# Altium PCB MAX96724_EVB_revB.PcbDoc (part 2 of 2)
Units mm, origin at the board's own origin, x right, y up, seen from the top; angles counter-clockwise.
Board outline 80 x 80 mm, 4 copper layers (Top Layer, Mid Layer 1, Mid Layer 2, Bottom Layer), stack 1.586 mm thick; 167 components, 106 nets, 496 pads, 209 vias.
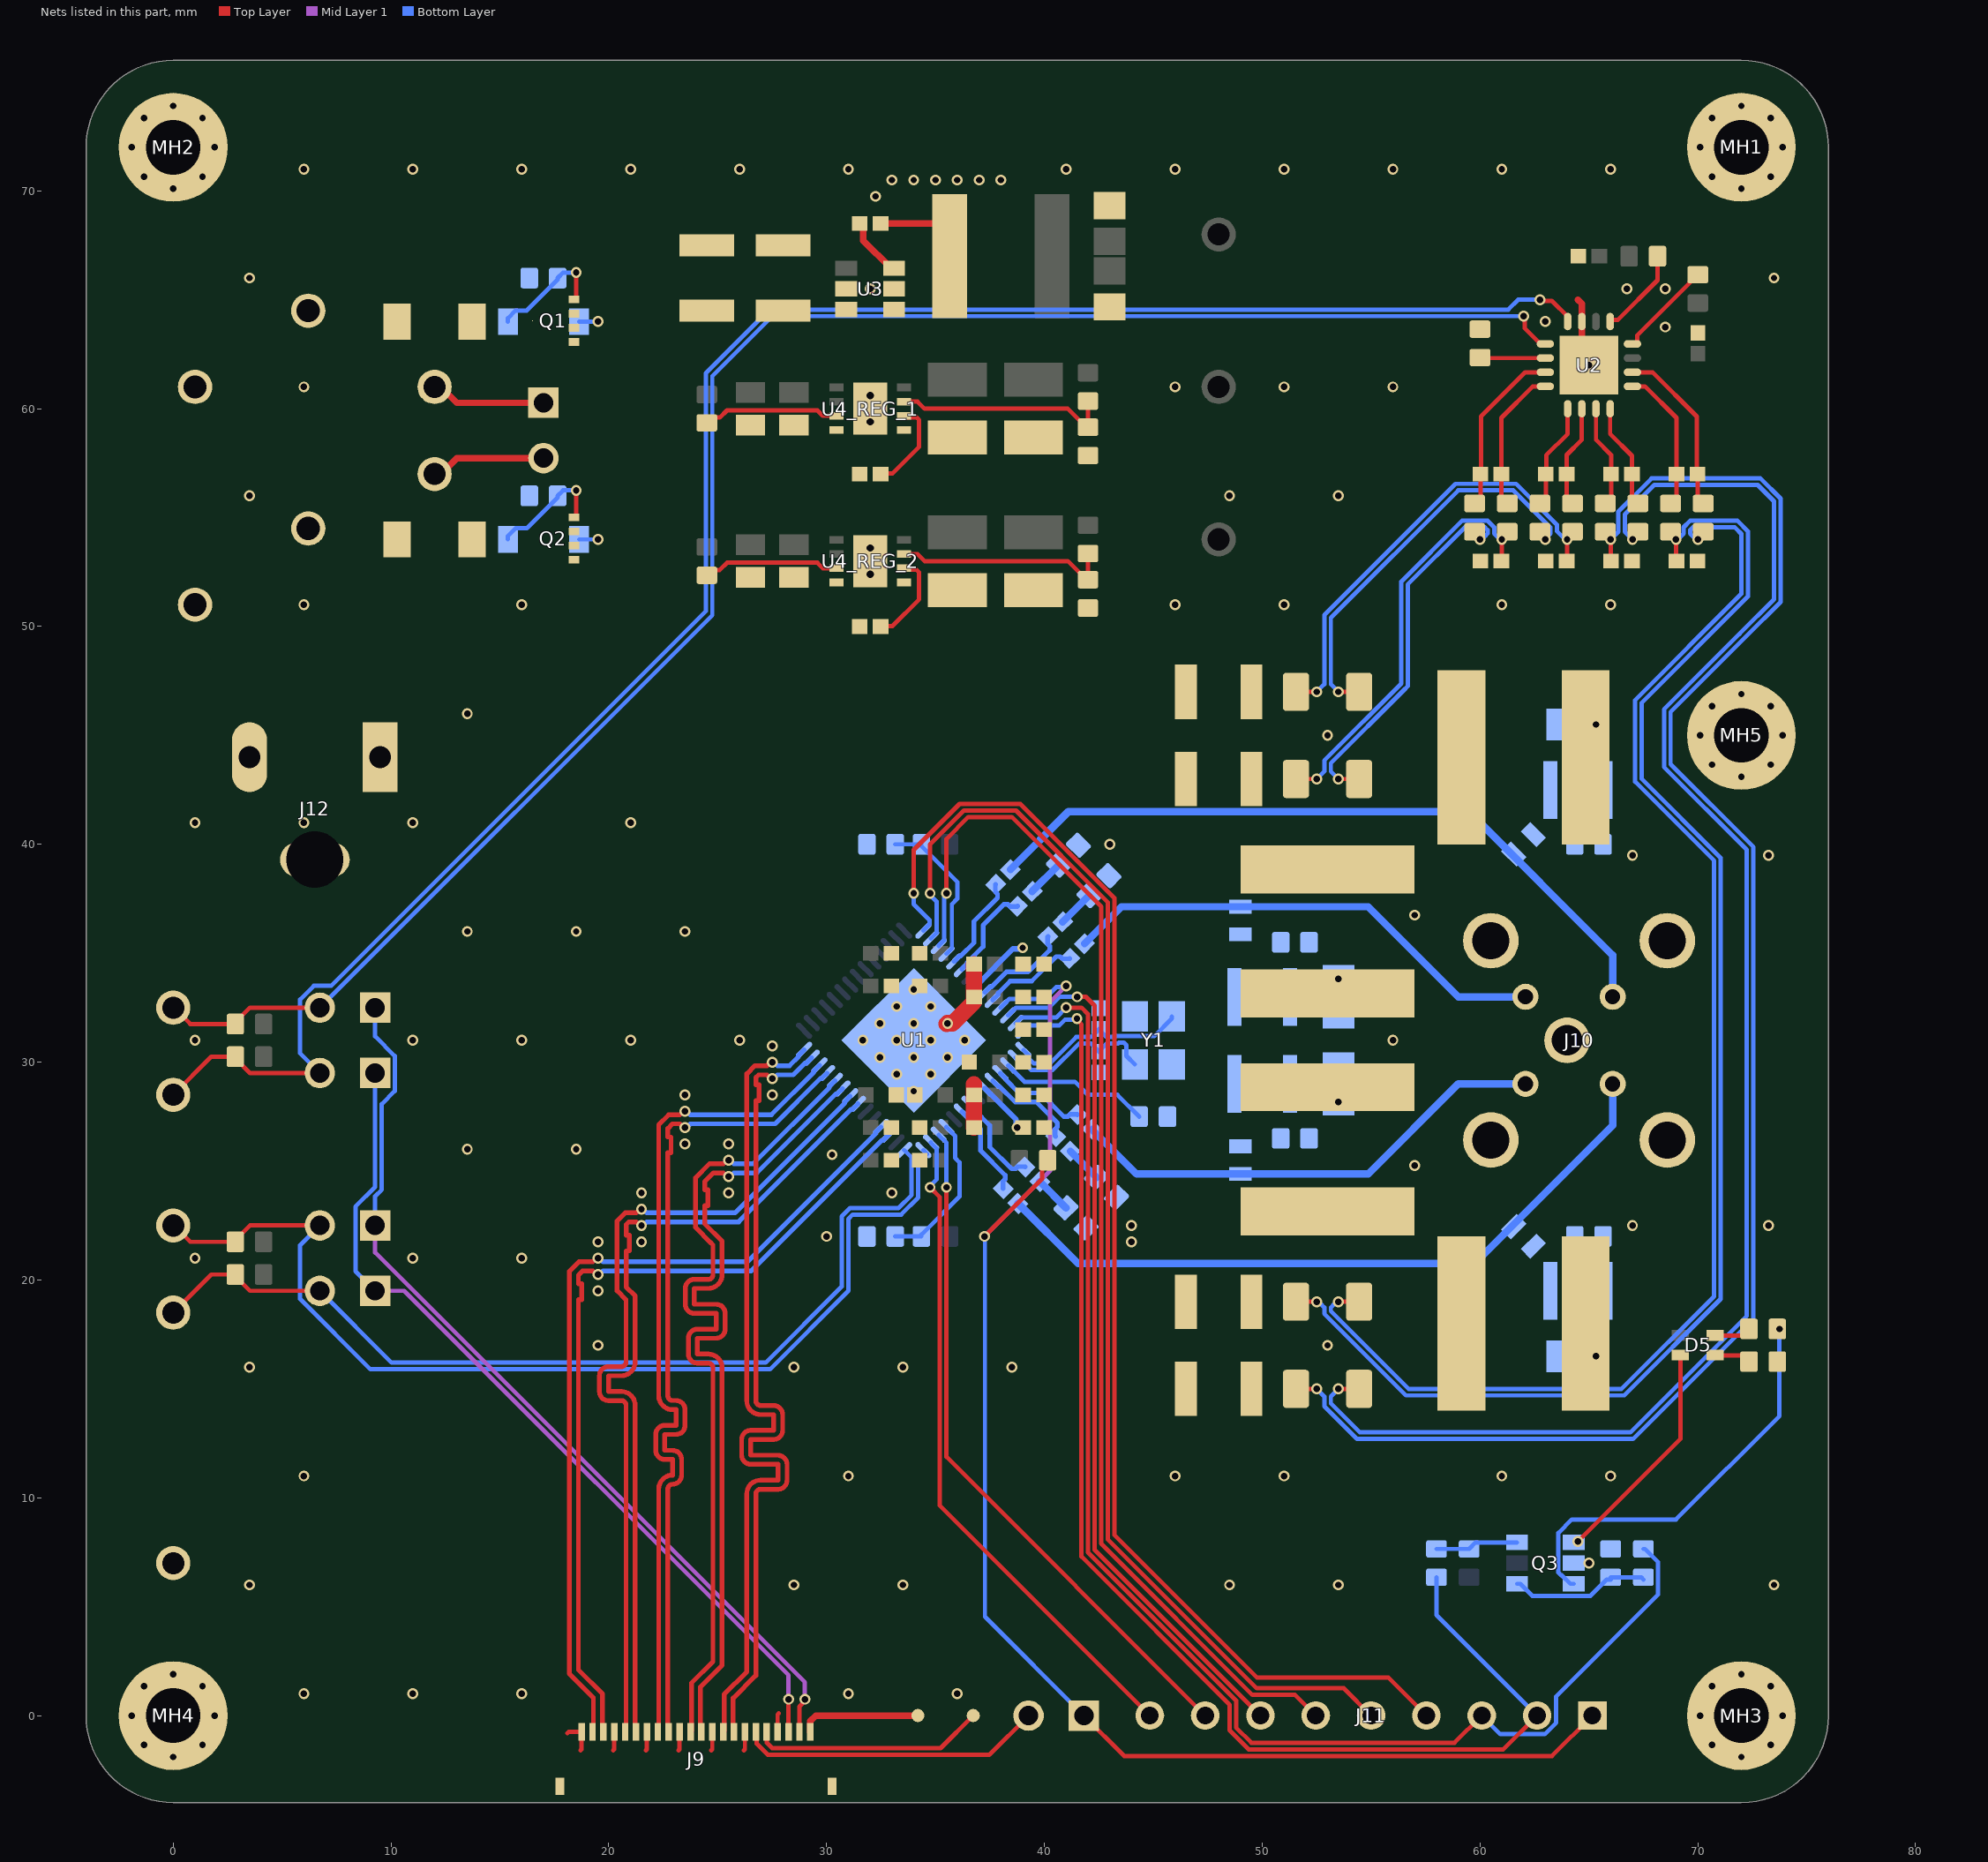
[diagram p4: the nets of this part, all layers, seen from the top]

## Via types
v1: diameter 0.5, hole 0.3, Top Layer to Bottom Layer, tented both sides, 205 vias
v2: diameter 0.66, hole 0.33, Top Layer to Bottom Layer, tented both sides, 4 vias

## Nets (pads, with @x,y where several pads share a name; then routed paths per layer and width w, separated by ;. In a path a pad name is that pad's centre, name@x,y a point inside that pad or via, vN(x,y) a via of type N, cw(c..) or ccw(c..) an arc to the next point about the centre after c; other vN are vias at no path point) (continued)
3V3_CAM_I2C_SCL: J14.1 P5.2 R5.1 U1.29 | length 43.6
  Top Layer w0.2: J14.1@0,18.5 1.75,20.25 R5.1@2.85,20.25 ; R5.1@2.85,20.175 3.525,19.5 P5.2@6.73,19.5
  Bottom Layer w0.2: P5.2@6.73,19.5 10.03,16.2 24.473,16.2 24.475,16.202 27.202,16.202 30.698,19.698 30.698,22.925 31.073,23.3 33.3,23.3 33.9,23.9 33.9,25.62 U1.29@33.558,25.962
3V3_CAM_I2C_SDA: J13.1 P4.2 R4.1 U1.28 | length 48.4
  Top Layer w0.2: J13.1@0,22.5 0.034,22.5 0.784,21.75 R4.1@2.85,21.75 ; R4.1@2.85,21.825 3.525,22.5 P4.2@6.73,22.5
  Bottom Layer w0.2: P4.2@6.73,22.5 5.828,21.598 5.828,19.127 9.057,15.898 24.598,15.898 24.6,15.9 27.4,15.9 31,19.5 31,22.8 31.198,22.998 33.425,22.998 34.202,23.775 34.202,25.368 34.602,25.769 34.602,25.801 U1.28@34.442,25.962
3V3_FPC_IO0: J9.6 P2.2 | length 14
  Top Layer w0.2: J9.6@26.75,-0.75 26.787,-0.787 26.787,-1.287 27.3,-1.8 37.47,-1.8 P2.2@39.27,0
3V3_FPC_IO1: J9.5 TP2.1 | length 10.7
  Top Layer w0.2: J9.5@27.25,-0.75 27.25,-1.25 27.498,-1.498 35.232,-1.498 TP2.1@36.73,0
3V3_FPC_SCL: J9.3 P5.1 P8.1 | length 39.6
  Top Layer w0.2: J9.3@28.25,-0.75 v1(28.25,0.75)
  Mid Layer 1 w0.2: P5.1@9.27,19.5 10.6,19.5 28.25,1.85 v1(28.25,0.75)
  Bottom Layer w0.2: P5.1@9.27,19.5 8.368,20.402 8.368,23.368 9.27,24.27 P8.1@9.27,29.5
3V3_FPC_SDA: J9.2 P4.1 P7.1 | length 42.3
  Top Layer w0.2: J9.2@28.75,-0.75 28.75,0.419 29,0.669 v1(29,0.75)
  Mid Layer 1 w0.2: P4.1@9.27,22.5 9.27,21.257 29,1.527 v1(29,0.75)
  Bottom Layer w0.2: P4.1@9.27,22.5 9.27,23.843 9.572,24.145 9.572,28.072 10.172,28.672 10.172,30.284 9.27,31.185 P7.1@9.27,32.5
3V3_LOCK: J11.3 R12.2 U1.13 | length 65.6
  Top Layer w0.2: v1(41,32.5) 41.707,32.5 42.002,32.206 42.002,7.492 48.802,0.692 48.802,-0.552 49.5,-1.25 58.83,-1.25 J11.3@60.08,0
  Bottom Layer w0.2: U1.13@38.685,31.795 38.932,32.043 40.543,32.043 v1(41,32.5) ; J11.3@60.08,0 60.937,-0.857 62.975,-0.857 63.5,-0.331 63.5,0.883 68.177,5.56 68.177,7.048 67.575,7.65 R12.2@67.5,7.65
3V3_MFP0: J11.4 U1.1 | length 63
  Top Layer w0.2: v1(34,37.75) 34,39.75 36.103,41.853 38.897,41.853 43.208,37.542 43.208,8.292 49.75,1.75 55.79,1.75 J11.4@57.54,0
  Bottom Layer w0.2: v1(34,37.75) 34,37.25 34.726,36.524 34.726,36.336 34.442,36.052 U1.1@34.442,36.038
3V3_MFP1: J11.5 U1.2 | length 59.8
  Top Layer w0.2: v1(34.75,37.75) 34.75,40 36.302,41.552 38.698,41.552 42.906,37.344 42.906,8.094 49.75,1.25 53.75,1.25 J11.5@55,0
  Bottom Layer w0.2: v1(34.75,37.75) 34.75,37.669 35.043,37.376 35.043,35.932 U1.2@34.795,35.685
3V3_MFP2: J11.6 U1.3 | length 56.7
  Top Layer w0.2: v1(35.5,37.75) 35.5,40.25 36.5,41.25 38.5,41.25 42.605,37.145 42.605,7.895 49.552,0.948 51.512,0.948 J11.6@52.46,0
  Bottom Layer w0.2: U1.3@35.149,35.331 35.149,35.354 35.397,35.602 35.397,37.565 35.5,37.669 v1(35.5,37.75)
3V3_MFP3: J11.7 U1.12 | length 40.2
  Top Layer w0.2: v1(41.5,33) 41.9,33 42.303,32.597 42.303,7.617 J11.7@49.92,0
  Bottom Layer w0.2: U1.12@38.331,32.149 38.345,32.149 38.696,32.5 40.2,32.5 40.7,33 v1(41.5,33)
3V3_MFP7: J11.8 U1.26 | length 31.7
  Top Layer w0.2: v1(35.5,24.25) 35.502,24.248 35.502,11.878 J11.8@47.38,0
  Bottom Layer w0.2: U1.26@35.149,26.669 35.149,26.655 35.5,26.304 v1(35.5,24.25)
3V3_MFP8: J11.9 U1.27 | length 30.7
  Top Layer w0.2: v1(34.75,24.25) 35.2,23.8 35.2,9.64 J11.9@44.84,0
  Bottom Layer w0.2: v1(34.75,24.25) 34.75,24.318 35.043,24.611 35.043,26.045 34.795,26.292 U1.27@34.795,26.315
3V3_nERRB: J11.2 R10.1 U1.14 | length 61.7
  Top Layer w0.2: v1(41.494,32) 41.494,31.939 41.7,31.733 41.7,7.3 48.5,0.5 48.5,-0.677 49.375,-1.552 61.068,-1.552 J11.2@62.62,0
  Bottom Layer w0.2: U1.14@39.038,31.442 39.286,31.689 40.689,31.689 40.944,31.944 41.437,31.944 v1(41.494,32) ; R10.1@58,6.35 58,4.62 J11.2@62.62,0
3V3_nPWDN: J11.1 P2.1 R3.1 U1.11 | length 70
  Top Layer w0.2: v1(37.25,22) 39.894,24.644 39.894,25.244 R3.1@40.15,25.5 ; P2.1@41.81,0 43.663,-1.853 63.307,-1.853 J11.1@65.16,0
  Mid Layer 1 w0.2: v1(37.25,22) 40.25,25 40.25,32.75 v1(41,33.5)
  Bottom Layer w0.2: v1@37.27,22 37.27,4.54 P2.1@41.81,0 ; U1.11@37.977,32.503 37.991,32.503 38.388,32.9 40,32.9 40.543,33.443 40.943,33.443 v1(41,33.5)
3V3_SNS_I2C_SCL: J16.1 P8.2 R7.1 U2.4 | length 89.9
  Top Layer w0.2: J16.1@0,28.5 1.75,30.25 R7.1@2.85,30.25 ; R7.1@2.85,30.175 3.525,29.5 P8.2@6.73,29.5 ; v1(62.75,65) 62.8,64.95 63.3,64.95 64.025,64.225 U2.4@64.025,64
  Bottom Layer w0.2: P8.2@6.73,29.5 5.828,30.402 5.828,32.873 6.455,33.5 7.25,33.5 24.448,50.698 24.448,61.625 27.375,64.552 61.302,64.552 61.75,65 v1(62.75,65)
3V3_SNS_I2C_SDA: J15.1 P7.2 R6.1 U2.5 | length 84
  Top Layer w0.2: J15.1@0,32.5 0.034,32.5 0.784,31.75 R6.1@2.85,31.75 ; R6.1@2.85,31.825 3.525,32.5 P7.2@6.73,32.5 ; v1(62,64.25) 62.05,64.2 62.05,63.7 62.775,62.975 U2.5@63,62.975
  Bottom Layer w0.2: P7.2@6.73,32.5 24.75,50.52 24.75,61.5 27.5,64.25 v1(62,64.25)
3V3_SNS_nALERT: R39.1 U2.1 | length 4.1
  Top Layer w0.2: U2.1@65.975,64 65.975,64.014 66.044,64.083 66.333,64.083 68.15,65.9 R39.1@68.15,67
CFG0: R15.1 R17.2 U1.4 | length 7
  Bottom Layer w0.2: R17.2@33.15,40 R15.1@34.35,40 ; R15.1@34.35,39.925 36,38.275 36,37.5 35.75,37.25 35.75,35.225 U1.4@35.503,34.977
CFG1: R20.1 R23.2 U1.25 | length 7.2
  Bottom Layer w0.2: R23.2@33.15,22 R20.1@34.35,22 34.35,22.075 36.1,23.825 36.1,25.4 35.9,25.6 35.9,26.612 35.503,27.009 U1.25@35.503,27.023
CSIA_CK_N: J9.15 U1.40 | length 38.8
  Top Layer w0.217: J9.15@22.25,-0.75 22.291,-0.709 22.291,9.236 22.291,10.402 cw(c22.926,10.402) 22.926,11.037 22.926,11.762 22.57,11.762 cw(c22.57,12.18) 22.152,12.18 22.152,12.905 cw(c22.57,12.905) 22.57,13.322 23.084,13.322 23.084,14.048 22.926,14.048 cw(c22.926,14.683) 22.291,14.683 22.291,15 22.291,27.124 22.751,27.584 23.257,27.584 23.424,27.75 v1(23.5,27.75)
  Bottom Layer w0.217: v1(23.5,27.75) 23.576,27.75 23.743,27.584 27.46,27.584 29.415,29.539 29.415,29.597 U1.40@29.669,29.851
CSIA_CK_P: J9.14 U1.39 | length 38.7
  Top Layer w0.217: J9.14@22.75,-0.75 22.709,-0.709 22.709,-0.198 22.709,9.236 22.709,10.402 cw(c22.926,10.402) 22.926,10.619 ccw(c22.926,11.037) 23.344,11.037 23.344,11.762 ccw(c22.926,11.762) 22.926,12.18 22.57,12.18 22.57,12.905 23.084,12.905 ccw(c23.084,13.322) 23.501,13.322 23.501,14.048 ccw(c23.084,14.048) 23.084,14.465 22.926,14.465 cw(c22.926,14.683) 22.709,14.683 22.709,15 22.709,25 22.709,25.834 22.857,25.834 22.857,26.56 22.709,26.56 22.709,26.75 22.709,26.951 22.924,27.166 23.257,27.166 23.424,27 v1(23.5,27)
  Bottom Layer w0.217: v1(23.5,27) 23.576,27 23.743,27.166 27.633,27.166 29.71,29.244 29.769,29.244 U1.39@30.023,29.497
CSIA_D0_N: J9.21 U1.32 | length 38.8
  Top Layer w0.217: J9.21@19.25,-0.75 19.291,-0.709 19.291,-0.198 19.291,0.818 18.183,1.927 18.183,2.5 18.183,11.5 18.183,20.389 18.627,20.834 19.257,20.834 19.424,21 v1(19.5,21)
  Bottom Layer w0.217: v1(19.5,21) 19.576,21 19.743,20.834 26.367,20.834 32.244,26.71 32.244,26.769 U1.32@32.497,27.023
CSIA_D0_P: J9.20 U1.31 | length 38.8
  Top Layer w0.217: v1(19.5,20.25) 19.424,20.25 19.257,20.416 18.8,20.416 18.6,20.216 18.6,20 18.6,19.824 18.748,19.824 18.748,19.099 18.6,19.099 18.6,18.265 18.6,2.1 19.709,0.991 19.709,-0.198 19.709,-0.709 J9.20@19.75,-0.75
  Bottom Layer w0.217: v1(19.5,20.25) 19.576,20.25 19.743,20.416 26.54,20.416 32.539,26.415 32.597,26.415 U1.31@32.851,26.669
CSIA_D1_N: J9.18 U1.36 | length 38.8
  Top Layer w0.217: J9.18@20.75,-0.75 20.791,-0.709 20.791,-0.198 20.791,11.75 20.791,14.243 ccw(c20.574,14.243) 20.574,14.46 19.985,14.46 cw(c19.985,14.878) 19.567,14.878 19.567,15.603 cw(c19.985,15.603) 19.985,16.02 20.574,16.02 ccw(c20.574,16.238) 20.791,16.238 20.791,17.698 20.791,19.093 20.379,19.505 20.379,22.712 20.751,23.084 21.257,23.084 21.424,23.25 v1(21.5,23.25)
  Bottom Layer w0.217: v1(21.5,23.25) 21.576,23.25 21.743,23.084 25.789,23.084 30.829,28.125 30.829,28.183 U1.36@31.083,28.437
CSIA_D1_P: J9.17 U1.35 | length 38.7
  Top Layer w0.217: J9.17@21.25,-0.75 21.209,-0.709 21.209,-0.198 21.209,11.75 21.209,14.243 ccw(c20.574,14.243) 20.574,14.878 19.985,14.878 19.985,15.603 20.574,15.603 ccw(c20.574,16.238) 21.209,16.238 21.209,17.698 21.209,19.266 20.797,19.678 20.797,20.5 20.797,21.334 20.944,21.334 20.944,22.06 20.797,22.06 20.797,22.25 20.797,22.539 20.924,22.666 21.257,22.666 21.424,22.5 v1(21.5,22.5)
  Bottom Layer w0.217: v1(21.5,22.5) 21.576,22.5 21.743,22.666 25.961,22.666 31.125,27.829 31.183,27.829 U1.35@31.437,28.083
CSIA_D2_N: J9.12 U1.38 | length 38.8
  Top Layer w0.217: J9.12@23.75,-0.75 23.791,-0.709 23.791,-0.198 23.791,1.491 24.783,2.483 24.783,15.03 24.783,15.964 ccw(c24.565,15.964) 24.565,16.181 24.069,16.181 cw(c24.069,16.599) 23.652,16.599 23.652,17.324 cw(c24.069,17.324) 24.069,17.742 24.926,17.742 24.926,18.467 23.927,18.467 cw(c23.927,18.884) 23.51,18.884 23.51,19.61 cw(c23.927,19.61) 23.927,20.027 24.565,20.027 ccw(c24.565,20.245) 24.783,20.245 24.783,21.606 24.684,21.705 23.983,22.406 23.983,24.689 24.627,25.334 25.257,25.334 25.424,25.5 v1(25.5,25.5)
  Bottom Layer w0.217: v1(25.5,25.5) 25.576,25.5 25.743,25.334 26.624,25.334 30.122,28.832 30.122,28.89 U1.38@30.376,29.144
CSIA_D2_P: J9.11 U1.37 | length 38.7
  Top Layer w0.217: J9.11@24.25,-0.75 24.209,-0.709 24.209,1.318 25.2,2.31 25.2,15.03 25.2,15.964 ccw(c24.565,15.964) 24.565,16.599 24.069,16.599 24.069,17.324 24.926,17.324 ccw(c24.926,17.742) 25.344,17.742 25.344,18.467 ccw(c24.926,18.467) 24.926,18.884 23.927,18.884 23.927,19.61 24.565,19.61 ccw(c24.565,20.245) 25.2,20.245 25.2,21.705 25.2,21.779 24.4,22.579 24.4,23.413 24.548,23.413 24.548,24.139 24.4,24.139 24.4,24.516 24.584,24.7 24.8,24.916 25.257,24.916 25.424,24.75 v1(25.5,24.75)
  Bottom Layer w0.217: v1(25.5,24.75) 25.576,24.75 25.743,24.916 26.797,24.916 30.418,28.537 30.476,28.537 U1.37@30.73,28.79
CSIA_D3_N: J9.9 U1.42 | length 38.8
  Top Layer w0.217: J9.9@25.25,-0.75 25.291,-0.709 25.291,-0.198 25.291,0.97 26.333,2.011 26.333,8.714 26.333,10.175 cw(c26.967,10.175) 26.967,10.809 27.764,10.809 27.764,11.535 26.518,11.535 cw(c26.518,11.952) 26.1,11.952 26.1,12.678 cw(c26.518,12.678) 26.518,13.095 27.562,13.095 27.562,13.82 26.967,13.82 cw(c26.967,14.455) 26.333,14.455 26.333,15.526 26.333,29.462 26.704,29.834 27.257,29.834 27.424,30 v1(27.5,30)
  Bottom Layer w0.217: v1(27.5,30) 27.576,30 27.743,29.834 28.296,29.834 28.708,30.246 28.708,30.304 U1.42@28.962,30.558
CSIA_D3_P: J9.8 U1.41 | length 38.7
  Top Layer w0.217: J9.8@25.75,-0.75 25.709,-0.709 25.709,0.797 26.75,1.838 26.75,8.714 26.75,10.175 cw(c26.967,10.175) 26.967,10.392 27.764,10.392 ccw(c27.764,10.809) 28.182,10.809 28.182,11.535 ccw(c27.764,11.535) 27.764,11.952 26.518,11.952 26.518,12.678 27.562,12.678 ccw(c27.562,13.095) 27.98,13.095 27.98,13.82 ccw(c27.562,13.82) 27.562,14.238 26.967,14.238 cw(c26.967,14.455) 26.75,14.455 26.75,15.526 26.75,27.399 26.75,28.233 26.898,28.233 26.898,28.959 26.75,28.959 26.75,29.205 26.75,29.289 26.877,29.416 27.257,29.416 27.424,29.25 v1(27.5,29.25)
  Bottom Layer w0.217: v1(27.5,29.25) 27.576,29.25 27.743,29.416 28.469,29.416 29.003,29.951 29.062,29.951 U1.41@29.315,30.205
FPC_3V3: J9.1 TP1.1 | length 5.5
  Top Layer w0.3: J9.1@29.25,-0.75 29.25,-0.25 29.5,0 TP1.1@34.19,0
GND: C6.2 C8.1 C10.2 C12.1 C14.1 C15.1 C16.2 C18.1 C20.2 C22.1 C26.1 C27.1 C28.1 C29.1 C30.1 C31.1 C32.1 C33.1 C34.1 C35.1 C37.1 C38.1 C39.1 C40.1 C41.1 C42.1 C43.1 C44.1 C45.1 C46.1 C47.2 C48.2 C49.2 C51.2 C52.2 C53.2 C54.2 C55_REG_1.2 C55_REG_2.2 C56_REG_1.2 C56_REG_2.2 C57_REG_1.2 C57_REG_2.2 C58_REG_1.2 C58_REG_2.2 C59_REG_1.2 C59_REG_2.2 J1.2 J6.2 J8.1 J9.4 J9.7 J9.10 J9.13 J9.16 J9.19 J9.22 J9.S1 J9.S2 J10.MH1 J10.MH2 J10.MH3 J10.MH4 J10.MH5 J12.2 J12.3 MH1.1 MH1.2 MH1.3 MH1.4 MH1.5 MH1.6 MH1.7 MH2.1 MH2.2 MH2.3 MH2.4 MH2.5 MH2.6 MH2.7 MH3.1 MH3.2 MH3.3 MH3.4 MH3.5 MH3.6 MH3.7 MH4.1 MH4.2 MH4.3 MH4.4 MH4.5 MH4.6 MH4.7 MH5.1 MH5.2 MH5.3 MH5.4 MH5.5 MH5.6 MH5.7 Q3.5 R1.1 R2.1 R9.1 R13.2 R17.1 R18.1 R22.1 R23.1 R24.1 R27.1 R30.1 R41.2 R44_REG_1.1 R44_REG_2.1 U1.57 U2.3 U2.17 U3.4 U4_REG_1.4 U4_REG_1.9 U4_REG_2.4 U4_REG_2.9 Y1.2 Y1.4 | length 15.3
  Top Layer w0.2: 18.1,-0.8 18.15,-0.75 J9.22@18.75,-0.75 18.75,-1.55 18.7,-1.6 ; 20.2,-1.6 20.25,-1.55 J9.19@20.25,-0.75 ; 21.7,-1.6 21.75,-1.55 J9.16@21.75,-0.75 ; 23.2,-1.6 23.25,-1.55 J9.13@23.25,-0.75 ; 24.7,-1.6 24.75,-1.55 J9.10@24.75,-0.75 ; 26.2,-1.6 26.25,-1.55 J9.7@26.25,-0.75 ; J9.4@27.75,-0.75 27.75,0.05 27.8,0.1
  Top Layer w0.3: 64.5,65 64.675,64.825 U2.3@64.675,64 64.675,62.325 v1(65,62)
  Top Layer w0.75: v1@35.5,31.75 v1@35.542,31.792 ; v1(35.556,31.778) 35.778,31.778 36.771,32.771 C39.1@36.771,33 ; C42.1@36.771,27 36.771,28.979 ; C39.1@36.771,33.021 C40.1@36.771,34.5
  other v1: 6,1 11,1 16,1 31,1 36,1 3.5,6 28.5,6 33.5,6 48.5,6 53.5,6 73.5,6 65,7 6,11 31,11 46,11 51,11 61,11 66,11 3.5,16 28.5,16 33.5,16 38.5,16 19.5,17 53,17 19.5,19.5 1,21 11,21 16,21 19.5,21.75 21.5,21.75 44,21.75 30,22 44,22.5 67,22.5 73.25,22.5 21.5,24 25.5,24 33,24 57,25.25 30.25,25.75 13.5,26 18.5,26 23.5,26.25 25.5,26.25 23.5,28.5 27.5,28.5 34,28.667 33.222,29.444 34.778,29.444 32.444,30.222 34,30.222 35.556,30.222 27.5,30.75 1,31 11,31 16,31 21,31 26,31 31.667,31 33.222,31 34.778,31 36.333,31 56,31 32.444,31.778 34,31.778 33.222,32.556 34.778,32.556 34,33.333 13.5,36 18.5,36 23.5,36 57,36.75 67,39.5 73.25,39.5 43,40 1,41 6,41 11,41 21,41 53,45 13.5,46 6,51 16,51 46,51 51,51 61,51 66,51 3.5,56 48.5,56 53.5,56 6,61 46,61 51,61 56,61 68.5,63.75 63,64 32,65.5 66.75,65.5 68.5,65.5 3.5,66 73.5,66 32.25,69.75 33,70.5 34,70.5 35,70.5 36,70.5 37,70.5 38,70.5 6,71 11,71 16,71 21,71 26,71 31,71 41,71 46,71 51,71 56,71 61,71 66,71
  other v2: 32,52.4 32,53.6 32,59.4 32,60.6
LO_VCC: C51.1 C52.1 D1.1 J3.1 P1.1 Q1.1 Q1.2 Q1.3 U3.2 U3.3 | length 6.2
  Top Layer w0.3: J3.1@12,61 12.287,61 13.017,60.27 P1.1@17,60.27
  Bottom Layer w0.2: D1.1@18.635,64 v1(19.5,64)
MAX96724_PoC_A_V_N: L1.1 R14.1 R32.1 | length 73.7
  Top Layer w0.2: v1(53.5,15) R14.1@54.45,15
  Bottom Layer w0.2: v1(53.5,15) 53.151,14.651 53.151,14.331 54.482,13 66.9,13 72.25,18.35 72.25,39.75 68.448,43.552 68.448,46.198 68.625,46.375 71.912,49.662 73.5,51.25 73.5,55.75 72.75,56.5 68,56.5 66.651,55.151 66.651,54.349 v1(67,54)
MAX96724_PoC_A_V_P: C8.2 F3.2 R14.2 R31.1 | length 76.7
  Top Layer w0.2: R14.2@51.55,15 v1(52.5,15) ; v1(66,54) 66,53.021 C8.2@66.021,53
  Bottom Layer w0.2: v1(52.5,15) 52.849,14.651 52.849,14.206 54.357,12.698 67.025,12.698 72.552,18.225 72.552,39.875 68.75,43.677 68.75,46.073 72.213,49.537 73.802,51.125 73.802,55.875 72.875,56.802 67.875,56.802 66.349,55.276 66.349,54.349 v1(66,54)
MAX96724_PoC_B_V_N: L4.1 R19.1 R34.1 | length 64.1
  Top Layer w0.2: v1(53.5,19) R19.1@54.45,19
  Bottom Layer w0.2: v1(53.5,19) 53.419,19 53.273,18.854 53.268,18.854 53.151,18.737 53.151,18.571 56.722,15 66.5,15 70.75,19.25 70.75,39.25 67.125,42.875 67.125,46.625 72,51.5 72,54.25 71.75,54.5 71.7,54.55 69.772,54.55 69.651,54.429 69.651,54.263 69.768,54.146 69.773,54.146 69.919,54 v1(70,54)
MAX96724_PoC_B_V_P: C12.2 F4.2 R19.2 R33.1 | length 67.1
  Top Layer w0.2: R19.2@51.55,19 v1(52.5,19) ; v1(69,54) 69,53.021 C12.2@69.021,53
  Bottom Layer w0.2: v1(52.5,19) 52.581,19 52.727,18.854 52.732,18.854 52.849,18.737 52.849,18.446 56.597,14.698 66.625,14.698 71.052,19.125 71.052,39.375 67.427,43 67.427,46.5 72.302,51.375 72.302,54.375 71.825,54.852 69.647,54.852 69.349,54.554 69.349,54.263 69.232,54.146 69.227,54.146 69.081,54 v1(69,54)
MAX96724_PoC_C_V_N: L7.1 R25.1 R36.1 | length 16.9
  Top Layer w0.2: v1(53.5,43) R25.1@54.45,43
  Bottom Layer w0.2: v1(53.5,43) 53.151,43.349 53.151,43.724 56.505,47.079 56.682,47.256 56.682,51.932 59.3,54.55 60.228,54.55 60.349,54.429 60.349,54.263 60.232,54.146 60.227,54.146 60.081,54 v1(60,54)
MAX96724_PoC_C_V_P: C18.2 F5.2 R25.2 R35.1 | length 18.9
  Top Layer w0.2: R25.2@51.55,43 v1(52.5,43) ; C18.2@60.979,53 61,53.021 v1(61,54)
  Bottom Layer w0.2: v1(52.5,43) 52.849,43.349 52.849,43.849 56.381,47.381 56.381,52.057 59.175,54.852 60.353,54.852 60.651,54.554 60.651,54.263 60.768,54.146 60.773,54.146 60.919,54 v1(61,54)
MAX96724_PoC_D_V_N: L10.1 R28.1 R40.1 | length 18.3
  Top Layer w0.2: v1(53.5,47) R28.1@54.45,47
  Bottom Layer w0.2: v1(53.5,47) 53.151,47.349 53.151,50.401 59,56.25 61.528,56.25 63.227,54.551 63.227,54.267 63,54.04 v1(63,54)
MAX96724_PoC_D_V_P: C22.2 F6.2 R28.2 R38.1 | length 20.5
  Top Layer w0.2: R28.2@51.55,47 v1(52.5,47) ; C22.2@63.979,53 64,53.021 v1(64,54)
  Bottom Layer w0.2: v1(52.5,47) 52.849,47.349 52.849,50.526 58.875,56.552 61.653,56.552 63.529,54.676 63.529,54.38 63.646,54.263 63.651,54.263 63.768,54.146 63.773,54.146 63.919,54 v1(64,54)
NetC6_1: C6.1 L1.2 L2.1 R16.2
  other v1: 65.326,16.5
NetC7_2: C7.2 R18.2 | length 1.7
  Bottom Layer w0.342: C7.2@39.788,24.512 R18.2@40.99,23.31
NetC10_1: C10.1 L4.2 L5.1 R21.2
  other v1: 53.5,28.174
NetC11_2: C11.2 R24.2 | length 1.7
  Bottom Layer w0.342: C11.2@41.188,25.912 R24.2@42.39,24.71
NetC16_1: C16.1 L7.2 L8.1 R26.2
  other v1: 53.5,33.826
NetC17_2: C17.2 R27.2 | length 1.7
  Bottom Layer w0.342: C17.2@40.838,36.438 R27.2@42.04,37.64
NetC20_1: C20.1 L10.2 L11.1 R29.2
  other v1: 65.326,45.5
NetC21_2: C21.2 R30.2 | length 1.7
  Bottom Layer w0.342: C21.2@39.438,37.838 R30.2@40.64,39.04
NetC23_1: C23.1 R32.2 U2.12 | length 4.9
  Top Layer w0.2: U2.12@65.975,60 65.975,58.844 66.979,57.84 66.979,55.921 R32.2@67.25,55.65
NetC23_2: C23.2 R31.2 U2.11 | length 4.8
  Top Layer w0.2: U2.11@65.325,60 65.325,58.575 66.021,57.879 66.021,55.921 R31.2@65.75,55.65
NetC24_1: C24.1 R34.2 U2.14 | length 7.9
  Top Layer w0.2: U2.14@67,61.675 67.925,61.675 69.957,59.643 69.957,57.043 70,57 70,55.9 R34.2@70.25,55.65
NetC24_2: C24.2 R33.2 U2.13 | length 6.7
  Top Layer w0.2: U2.13@67,61.025 67.575,61.025 69.021,59.579 C24.2@69.021,57 69.021,55.921 R33.2@68.75,55.65
NetC25_1: C25.1 R36.2 U2.7 | length 7.9
  Top Layer w0.2: R36.2@59.75,55.65 60.021,55.921 C25.1@60.021,57 ; C25.1@60.043,57 60.043,59.643 62.075,61.675 U2.7@63,61.675
NetC25_2: C25.2 R35.2 U2.8 | length 6.7
  Top Layer w0.2: R35.2@61.25,55.65 60.979,55.921 60.979,59.579 62.425,61.025 U2.8@63,61.025
NetC28_2: C28.2 C29.2 C30.2 U1.8 | length 2.8
  Bottom Layer w0.25: U1.8@36.917,33.563 38.556,35.202 38.952,35.202 v1(39,35.25)
NetC31_2: C31.2 C32.2 C33.2 U1.20 | length 2.4
  Bottom Layer w0.25: U1.20@37.27,28.79 38.702,27.359 38.702,27.048 v1(38.75,27)
NetC36_1: C36.1 R40.2 U2.9 | length 4.9
  Top Layer w0.2: R40.2@62.75,55.65 63.021,55.921 C36.1@63.021,57 ; C36.1@63.043,57 63.043,57.862 64.025,58.844 U2.9@64.025,60
NetC36_2: C36.2 R38.2 U2.10 | length 4.8
  Top Layer w0.2: R38.2@64.25,55.65 63.979,55.921 63.979,57.879 64.675,58.575 U2.10@64.675,60
NetC50_1: C50.1 U3.6 | length 2.8
  Top Layer w0.3: C50.1@31.521,68.5 31.686,68.336 31.686,67.714 32.949,66.45 U3.6@33.099,66.45
NetC50_2: C50.2 L13.1 U3.5 | length 4.3
  Top Layer w0.3: C50.2@32.479,68.5 35,68.5 35.65,67.85 L13.1@35.65,67
NetC59_REG_1_1: C59_REG_1.1 U4_REG_1.6 | length 4.3
  Top Layer w0.2: C59_REG_1.1@32.479,57 32.498,57.019 33.019,57.019 34.25,58.25 34.25,59.483 34.133,59.6 33.625,59.6 U4_REG_1.6@33.55,59.675
NetC59_REG_2_1: C59_REG_2.1 U4_REG_2.6 | length 4.3
  Top Layer w0.2: C59_REG_2.1@32.479,50 32.498,50.019 33.019,50.019 34.25,51.25 34.25,52.483 34.133,52.6 33.625,52.6 U4_REG_2.6@33.55,52.675
NetD1_2: D1.2 Q1.4 R1.2 | length 5.5
  Top Layer w0.2: Q1.4@18.4,65.012 18.425,65.012 18.5,65.087 v1(18.5,66.25)
  Bottom Layer w0.2: D1.2@15.365,64 15.365,64.155 15.72,64.51 16.235,64.51 17.65,65.925 R1.2@17.65,66 17.9,66.25 v1(18.5,66.25)
NetD2_2: D2.2 Q2.4 R2.2 | length 5.5
  Top Layer w0.2: Q2.4@18.4,55.012 18.425,55.012 18.5,55.087 v1(18.5,56.25)
  Bottom Layer w0.2: D2.2@15.365,54 15.365,54.155 15.72,54.51 16.235,54.51 17.65,55.925 R2.2@17.65,56 17.9,56.25 v1(18.5,56.25)
NetD5_1: D5.1 R8.2 | length 1.7
  Top Layer w0.2: D5.1@70.8,17.45 72.05,17.45 R8.2@72.35,17.75
NetD5_3: D5.3 Q3.4 | length 10.5
  Top Layer w0.2: v1(64.5,8) 69.2,12.7 D5.3@69.2,16.55
NetD5_4: D5.4 R9.2 | length 1.7
  Top Layer w0.2: D5.4@70.8,16.55 70.812,16.538 72.062,16.538 R9.2@72.35,16.25
NetF1_1: F1.1 J1.1
NetF1_2: F1.2 Q1.5-6-7-8
NetF2_1: F2.1 J6.1 J12.1
NetF2_2: F2.2 Q2.5-6-7-8
NetL2_2: L2.2 L3.1 R16.1
NetL5_2: L5.2 L6.1 R21.1
NetL8_2: L8.2 L9.1 R26.1
NetL11_2: L11.2 L12.1 R29.1
NetQ3_1: Q3.1 R12.1 R13.1 | length 6.4
  Bottom Layer w0.2: Q3.1@61.7,6.05 61.85,6.05 62.402,5.498 65.073,5.498 65.825,6.25 R13.1@66,6.25 ; R13.1@66,6.35 67.4,6.35 R12.1@67.5,6.25
NetQ3_3: Q3.3 R10.2 R11.2 | length 3.8
  Bottom Layer w0.2: R10.2@58,7.65 R11.2@59.5,7.65 59.8,7.95 Q3.3@61.7,7.95
NetQ3_6: Q3.6 R8.1 | length 19.1
  Bottom Layer w0.2: Q3.6@64.3,6.05 64.15,6.05 63.759,6.441 63.723,6.441 63.598,6.566 63.598,8.384 64.215,9 69,9 73.75,13.75 v1(73.75,17.75)
NetR22_2: R22.2 U1.17 | length 7
  Bottom Layer w0.2: U1.17@38.331,29.851 39.082,29.1 41.4,29.1 42,28.5 43.35,28.5 R22.2@44.35,27.5
NetR37_1: R37.1 U2.16 | length 4.6
  Top Layer w0.2: U2.16@67,62.975 67.156,62.975 67.225,63.044 67.225,63.375 69.625,65.775 69.625,65.85 69.925,66.15 R37.1@70,66.15
NetR41_1: R41.1 U2.6 | length 3
  Top Layer w0.2: R41.1@60,62.35 60.025,62.325 U2.6@63,62.325
NetR42_REG_1_1: R42_REG_1.1 R44_REG_1.2 U4_REG_1.7 | length 10.1
  Top Layer w0.2: U4_REG_1.7@33.55,60.325 34.175,60.325 34.5,60 41.075,60 41.925,59.15 42,59.225 R42_REG_1.1@42,60.35
NetR42_REG_2_1: R42_REG_2.1 R44_REG_2.2 U4_REG_2.7 | length 10.1
  Top Layer w0.2: U4_REG_2.7@33.55,53.325 34.175,53.325 34.5,53 41.075,53 41.925,52.15 42,52.225 R42_REG_2.1@42,53.35
NetR43_REG_1_2: R43_REG_1.2 U4_REG_1.3 | length 6.3
  Top Layer w0.2: R43_REG_1.2@24.5,59.35 24.745,59.595 25.095,59.595 25.427,59.927 29.573,59.927 29.825,59.675 U4_REG_1.3@30.45,59.675
NetR43_REG_2_2: R43_REG_2.2 U4_REG_2.3 | length 6.3
  Top Layer w0.2: R43_REG_2.2@24.5,52.35 24.745,52.595 25.095,52.595 25.427,52.927 29.573,52.927 29.825,52.675 U4_REG_2.3@30.45,52.675
NetU4_REG_1_5: U4_REG_1.5
NetU4_REG_2_5: U4_REG_2.5
PoC_VCC: D2.1 F3.1 F4.1 F5.1 F6.1 J2.1 P1.2 Q2.1 Q2.2 Q2.3 | length 6.2
  Top Layer w0.3: J2.1@12,57 12.287,57 13.017,57.73 P1.2@17,57.73
  Bottom Layer w0.2: D2.1@18.635,54 v1(19.5,54)
RF_A: C5.2 J10.2 L3.2 | length 33
  Bottom Layer w0.342: C5.2@38.788,23.512 41.55,20.75 59.75,20.75 66.09,27.09 J10.2@66.09,29
RF_B: C9.2 J10.1 L6.2 | length 22.5
  Bottom Layer w0.342: C9.2@42.188,26.912 44.235,24.865 L6.2@49,24.865 54.865,24.865 59,29 J10.1@62.09,29
RF_C: C13.2 J10.4 L9.2 | length 22.7
  Bottom Layer w0.342: C13.2@41.838,35.438 43.535,37.135 L9.2@49,37.135 54.865,37.135 59,33 J10.4@62.09,33
RF_D: C19.2 J10.3 L12.2 | length 33.4
  Bottom Layer w0.342: C19.2@38.438,38.838 41.1,41.5 59.5,41.5 66.09,34.91 J10.3@66.09,33
SIOA_N: C7.1 U1.22 | length 4.4
  Bottom Layer w0.217: U1.22@36.563,28.083 36.817,27.829 36.817,27.771 37.491,27.097 37.491,26.104 38.493,25.102 38.673,25.102 38.775,25.204 39.096,25.204 C7.1@39.112,25.188
SIOA_P: C5.1 U1.23 | length 4.4
  Bottom Layer w0.217: U1.23@36.21,27.73 36.463,27.476 36.522,27.476 37.074,26.924 37.074,25.931 38.198,24.807 38.198,24.627 38.096,24.525 38.096,24.204 C5.1@38.112,24.188
SIOB_N: C11.1 U1.19 | length 4.4
  Bottom Layer w0.217: U1.19@37.624,29.144 37.878,28.89 37.936,28.89 38.656,28.17 39.635,28.17 40.598,27.207 40.598,27.027 40.496,26.925 40.496,26.604 C11.1@40.512,26.588
SIOB_P: C9.1 U1.18 | length 4.4
  Bottom Layer w0.217: U1.18@37.977,29.497 38.231,29.244 38.231,29.185 38.829,28.588 39.807,28.588 40.893,27.502 41.073,27.502 41.175,27.604 41.496,27.604 C9.1@41.512,27.588
SIOC_N: C17.1 U1.9 | length 4.4
  Bottom Layer w0.217: U1.9@37.27,33.21 37.524,33.463 37.583,33.463 38.259,34.14 39.245,34.14 40.248,35.143 40.248,35.323 40.146,35.425 40.146,35.746 C17.1@40.162,35.762
SIOC_P: C13.1 U1.10 | length 4.4
  Bottom Layer w0.217: U1.10@37.624,32.856 37.878,33.11 37.878,33.168 38.432,33.722 39.417,33.722 40.543,34.848 40.723,34.848 40.825,34.746 41.146,34.746 C13.1@41.162,34.762
SIOD_N: C21.1 U1.6 | length 4.4
  Bottom Layer w0.217: U1.6@36.21,34.27 36.463,34.524 36.463,34.583 37.182,35.301 37.182,36.286 38.143,37.248 38.323,37.248 38.425,37.146 38.746,37.146 C21.1@38.762,37.162
SIOD_P: C19.1 U1.5 | length 4.4
  Bottom Layer w0.217: U1.5@35.856,34.624 36.11,34.878 36.168,34.878 36.764,35.473 36.764,36.459 37.848,37.543 37.848,37.723 37.746,37.825 37.746,38.146 C19.1@37.762,38.162
X25_N: C15.2 U1.16 Y1.3 | length 7.2
  Bottom Layer w0.2: U1.16@38.685,30.205 38.942,29.947 39.082,29.947 39.391,29.638 40.373,29.638 41.584,30.849 42.151,30.849 C15.2@42.5,30.5 ; C15.2@42.5,30.479 C15.2@42.5,30.5 ; Y1.3@44.15,29.9 43.764,30.286 43.764,30.78 43.647,30.897 43.423,30.897 43.375,30.849 42.849,30.849 C15.2@42.5,30.5
X25_P: C14.2 U1.15 Y1.1 | length 8.4
  Bottom Layer w0.2: U1.15@39.038,30.558 39.295,30.301 39.295,30.161 39.516,29.94 40.248,29.94 41.459,31.151 42.151,31.151 C14.2@42.5,31.5 ; C14.2@42.5,31.521 C14.2@42.5,31.5 ; Y1.1@45.85,32.1 45.85,32 45.043,31.193 43.777,31.193 43.772,31.198 43.298,31.198 43.25,31.151 42.849,31.151 C14.2@42.5,31.5
pads on no net: U1.33 U1.34 U1.43 U1.44 U1.45 U1.46 U1.47 U1.48 U1.49 U1.50 U1.51 U1.52 U1.53 U1.54

## Polygon pours and split planes (outlines as drawn)
GND on Bottom Layer "GND_L04_P050" (solid, remove dead copper, pour order 50): -4,0 -4,72 cw(c0,72) 0,76 72,76 cw(c72,72) 76,72 76,0 cw(c72,0) 72,-4 0,-4 cw(c0,0)
NetL2_2 on Bottom Layer "NETL2_2_L04_P001" (solid, remove dead copper, pour order 1): 61.75,21.5 62.75,20.5 62.75,18 63.75,18 63.75,20.5 64.75,21.5 64.75,22.5 62.75,22.5
NetC6_1 on Bottom Layer "NETC6_1_L04_P000" (solid, remove dead copper, pour order 0): 64.5,15.5 66.25,15.5 66.25,22.5 65,22.5 65,17.5 64.5,17.5
NetC20_1 on Bottom Layer "NETC20_1_L04_P002" (solid, remove dead copper, pour order 2): 64.5,46.5 66.25,46.5 66.25,39.5 65,39.5 65,44.5 64.5,44.5
NetL11_2 on Bottom Layer "NETL11_2_L04_P003" (solid, remove dead copper, pour order 3): 61.75,40.5 62.75,41.5 62.75,44 63.75,44 63.75,41.5 64.75,40.5 64.75,39.5 62.75,39.5
NetL5_2 on Bottom Layer "NETL5_2_L04_P024" (solid, remove dead copper, pour order 24): 48.25,30.5 48.25,25.75 51.25,25.75 51.25,27.25 49.5,27.25 49.5,30.5
NetL8_2 on Bottom Layer "NETL8_2_L04_P043" (solid, remove dead copper, pour order 43): 48.25,31.5 48.25,36.25 51.25,36.25 51.25,34.75 49.5,34.75 49.5,31.5
NetC16_1 on Bottom Layer "NETC16_1_L04_P044" (solid, remove dead copper, pour order 44): 50.5,34.75 51.25,34.75 51.25,36.25 54.5,36.25 54.5,33 52.5,33 52.5,31.5 50.5,31.5
NetC10_1 on Bottom Layer "NETC10_1_L04_P045" (solid, remove dead copper, pour order 45): 50.5,27.25 51.25,27.25 51.25,25.75 54.5,25.75 54.5,29 52.5,29 52.5,30.5 50.5,30.5
1V2 on Bottom Layer "1V2_L04_P046" (solid, remove dead copper, pour order 46): 33.5,35 32.75,35.75 31.5,35.75 31.5,36.5 32.5,37.5 34,37.5 34,36 34,35.5
GND on Top Layer "GND_L01_P048" (solid, remove dead copper, pour order 48): -4,0 -4,72 cw(c0,72) 0,76 72,76 cw(c72,72) 76,72 76,0 cw(c72,0) 72,-4 0,-4 cw(c0,0)
1V2 on Top Layer "1V2_L01_P026" (solid, remove dead copper, pour order 26): 32,24.25 32.5,24.75 32.5,29.25 30.75,31 32.5,32.75 32.5,35.5 34.75,35.5 34.75,33 36.25,33 36.25,37.5 31,37.5 31,33.5 28.5,31 31,28.5 31,24.25
3V3 on Top Layer "3V3_L01_P006" (solid, remove dead copper, pour order 6): 66.5,62 71.75,62 71.75,63 67.25,63 67.25,62.75 66.5,62.75
3V3 on Top Layer "3V3_L01_P007" (solid, remove dead copper, pour order 7): 65.75,63.5 65.75,64.25 66,64.25 66,68.75 65,68.75 65,63.5
1V8 on Top Layer "1V8_L01_P021" (solid, remove dead copper, pour order 21): 37.25,35 36.25,35 36.25,41.25 38.75,41.25 38.75,35.75 38.5,35.75 38.5,26.5 37.25,26.5
PoC_VCC on Top Layer "POC_VCC_L01_P035" (solid, remove dead copper, pour order 35): 44.75,13.5 44,14.25 44,48.5 49,48.5 49,13.5
3V3 on Top Layer "3V3_L01_P036" (solid, remove dead copper, pour order 36): 44,68.5 42,68.5 42,70 39.5,70 39.5,64 42,64 42,65.5 44,65.5
MAX96724_PoC_C_V_P on Top Layer "MAX96724_POC_C_V_P_L01_P004" (solid, remove dead copper, pour order 4): 52.25,45 49,45 49,41.5 52.25,41.5
MAX96724_PoC_D_V_P on Top Layer "MAX96724_POC_D_V_P_L01_P005" (solid, remove dead copper, pour order 5): 49,48.5 52.25,48.5 52.25,45 49,45
MAX96724_PoC_A_V_P on Top Layer "MAX96724_POC_A_V_P_L01_P034" (solid, remove dead copper, pour order 34): 52.25,17 49,17 49,13.5 52.25,13.5
MAX96724_PoC_B_V_P on Top Layer "MAX96724_POC_B_V_P_L01_P033" (solid, remove dead copper, pour order 33): 49,20.5 52.25,20.5 52.25,17 49,17
MAX96724_PoC_A_V_N on Top Layer "MAX96724_POC_A_V_N_L01_P030" (solid, remove dead copper, pour order 30): 53.75,17 57,17 57,22 60.5,22 60.5,13.5 53.75,13.5
MAX96724_PoC_B_V_N on Top Layer "MAX96724_POC_B_V_N_L01_P029" (solid, remove dead copper, pour order 29): 57,24.5 57,17 53.75,17 53.75,20.5 49,20.5 49,24.5
MAX96724_PoC_D_V_N on Top Layer "MAX96724_POC_D_V_N_L01_P028" (solid, remove dead copper, pour order 28): 53.75,45 57,45 57,40 60.5,40 60.5,48.5 53.75,48.5
MAX96724_PoC_C_V_N on Top Layer "MAX96724_POC_C_V_N_L01_P027" (solid, remove dead copper, pour order 27): 57,37.5 57,45 53.75,45 53.75,41.5 49,41.5 49,37.5
NetC28_2 on Top Layer "NETC28_2_L01_P022" (solid, remove dead copper, pour order 22): 38.5,35.75 38.5,30.75 39.5,30.75 39.5,35.75
NetC31_2 on Top Layer "NETC31_2_L01_P023" (solid, remove dead copper, pour order 23): 39.5,30.75 38.5,30.75 38.5,26.5 39.5,26.5
3V3 on Top Layer "3V3_L01_P025" (solid, remove dead copper, pour order 25): 34.75,25 37,25 37,26.5 36.25,26.5 36.25,29 34.75,29
PoC_VCC on Top Layer "POC_VCC_L01_P019" (solid, remove dead copper, pour order 19): 44,43.5 44,48.5 23,48.5 23,59 16,59 16,56 18,56 18,43.5
LO_VCC on Top Layer "LO_VCC_L01_P018" (solid, remove dead copper, pour order 18): 31.5,66 31.5,63 23,63 23,59 16,59 16,62 18,62 18,66
NetF2_2 on Top Layer "NETF2_2_L01_P017" (solid, remove dead copper, pour order 17): 13,55.5 17.5,55.5 17.5,52.5 13,52.5
NetF1_2 on Top Layer "NETF1_2_L01_P016" (solid, remove dead copper, pour order 16): 13,65.5 17.5,65.5 17.5,62.5 13,62.5
NetF1_1 on Top Layer "NETF1_1_L01_P015" (solid, remove dead copper, pour order 15): 11,65.5 5,65.5 5,62.5 11,62.5
NetF2_1 on Top Layer "NETF2_1_L01_P014" (solid, remove dead copper, pour order 14): 11,42 8,42 8,52.5 5,52.5 5,55.5 11,55.5
NetC50_2 on Top Layer "NETC50_2_L01_P013" (solid, remove dead copper, pour order 13): 32.5,66 33.75,66 33.75,70 36.5,70 36.5,64 33.75,64 33.75,65 32.5,65
3V3 on Top Layer "3V3_L01_P012" (solid, remove dead copper, pour order 12): 31,60 25.25,60 25.25,61.5 31,61.5
3V3 on Top Layer "3V3_L01_P010" (solid, remove dead copper, pour order 10): 31,53 25.25,53 25.25,54.5 31,54.5
1V8 on Top Layer "1V8_L01_P009" (solid, remove dead copper, pour order 9): 33,60.5 34,60.5 34.5,60 41,60 41,63 33,63
1V2 on Top Layer "1V2_L01_P008" (solid, remove dead copper, pour order 8): 33,53.5 34,53.5 34.5,53 41,53 41,56 33,56
GND on Mid Layer 1 "GND_L02_P049" (solid, remove dead copper, pour order 49): -4,0 -4,72 cw(c0,72) 0,76 72,76 cw(c72,72) 76,72 76,0 cw(c72,0) 72,-4 0,-4 cw(c0,0)
3V3 on Mid Layer 1 "3V3_L02_P039" (solid, remove dead copper, pour order 39): 65.75,68.5 73,61.25 73,59.75 70,59.75 64.25,65.5 44,65.5 44,63 37.5,63 37.5,56 28.5,56 28.5,53 24.5,53 24.5,68.5
1V8 on Mid Layer 1 "1V8_L02_P038" (solid, remove dead copper, pour order 38): 36.25,40.25 36.25,46.25 37.5,47.5 37.5,63 42.5,63 42.5,40.25
1V2 on Mid Layer 1 "1V2_L02_P037" (solid, remove dead copper, pour order 37): 33.5,35.5 33.5,43.5 37.5,47.5 37.5,56 28.5,56 28.5,35.5
GND on Mid Layer 2 "GND_L03_P051" (solid, remove dead copper, pour order 51): -4,0 -4,72 cw(c0,72) 0,76 72,76 cw(c72,72) 76,72 76,0 cw(c72,0) 72,-4 0,-4 cw(c0,0)

## Other copper
Mid Layer 2:
  pour cut-out: 48.4,36.7 49.6,36.7 49.6,37.5 48.4,37.5
  pour cut-out: 48.4,25.3 49.6,25.3 49.6,24.5 48.4,24.5
  pour cut-out: 60.9,22.3 61.7,23.1 62.2,22.6 61.4,21.8
  pour cut-out: 60.9,39.7 61.7,38.9 62.2,39.4 61.4,40.2
Bottom Layer:
  pour cut-out: 21.75,23 21.75,20.5 26.5,20.5 33,27 30,30 29.75,30 29.75,29.75 27.25,27.25 25.75,27.25 25.75,23

## Silkscreen, mask and mechanical layers (free items; w line width, h text height)
Top Overlay:
  drawing of 44 lines, arcs and shapes, not listed
  text "3V3" at 50.254,67.238 h1.52
  text "VCC" at 9.254,66.238 h1.52
  text "1V8" at 50.254,60.238 h1.52
  text "1V2" at 50.254,53.238 h1.52
  text "PoC" at 9.254,50.238 h1.52
  text "POWER" at 27.505,40.5 h3
  text "PAC1934" at -0.451,34.738 h1.52
  text "I2C" at 14.002,32.501 h3
  text "D" at -3.02,31.738 h1.52
  text "C" at -3.02,27.738 h1.52
  text "MAX96724" at -1.34,24.738 h1.52
  text "D" at -3.02,21.738 h1.52
  text "GR: LOCK" at 68.188,19.15 h0.75
  text "C" at -3.02,17.738 h1.52
  text "RD: ERRB" at 68.188,14.1 h0.75
  text "MAX96724 EVB" at 7.25,10.25 h2.5
  text "GND" at -2.031,9.254 h1.52
  text "Project:" at 7.05,7.467 h1.25
  text "BRZ" at 18.2,7.45 h1.25
  text "GPIO" at 42.5,7.001 h3
  text "Revision:" at 7.05,5.3 h1.25
  text "B" at 18.2,5.2 h1.25
  text "PWDN" at 41.435,4.899 h0.75 r270
  text "MFP8" at 44.465,4.899 h0.75 r270
  text "MFP7" at 47.005,4.899 h0.75 r270
  text "MFP3" at 49.545,4.899 h0.75 r270
  text "MFP2" at 52.085,4.899 h0.75 r270
  text "MFP0" at 57.165,4.899 h0.75 r270
  text "LOCK" at 59.705,4.899 h0.75 r270
  text "ERRB" at 62.245,4.899 h0.75 r270
  text "PWDN" at 64.785,4.899 h0.75 r270
  text "MFP1" at 54.625,4.649 h0.75 r270
  text "3V3" at 33.815,4.149 h0.75 r270
  text "IO0" at 38.895,4.024 h0.75 r270
  text "IO1" at 36.355,3.774 h0.75 r270
  text "Date:" at 7.05,3.05 h1.25
  text "28/01/2026" at 18.2,2.95 h1.25
  text "CSI" at 13.191,-2.762 h1.52
Mechanical 1:
  the board outline again, w0.254